# Altium PCB as5600-module.PcbDoc
Units mm, origin at the board's own origin, x right, y up, seen from the top; angles counter-clockwise.
Board outline 42 x 42 mm, 2 copper layers (Top Layer, Bottom Layer), stack 1.581 mm thick; 31 components, 23 nets, 129 pads, 69 vias.
Unrouted connection lines stored in the file: 1.
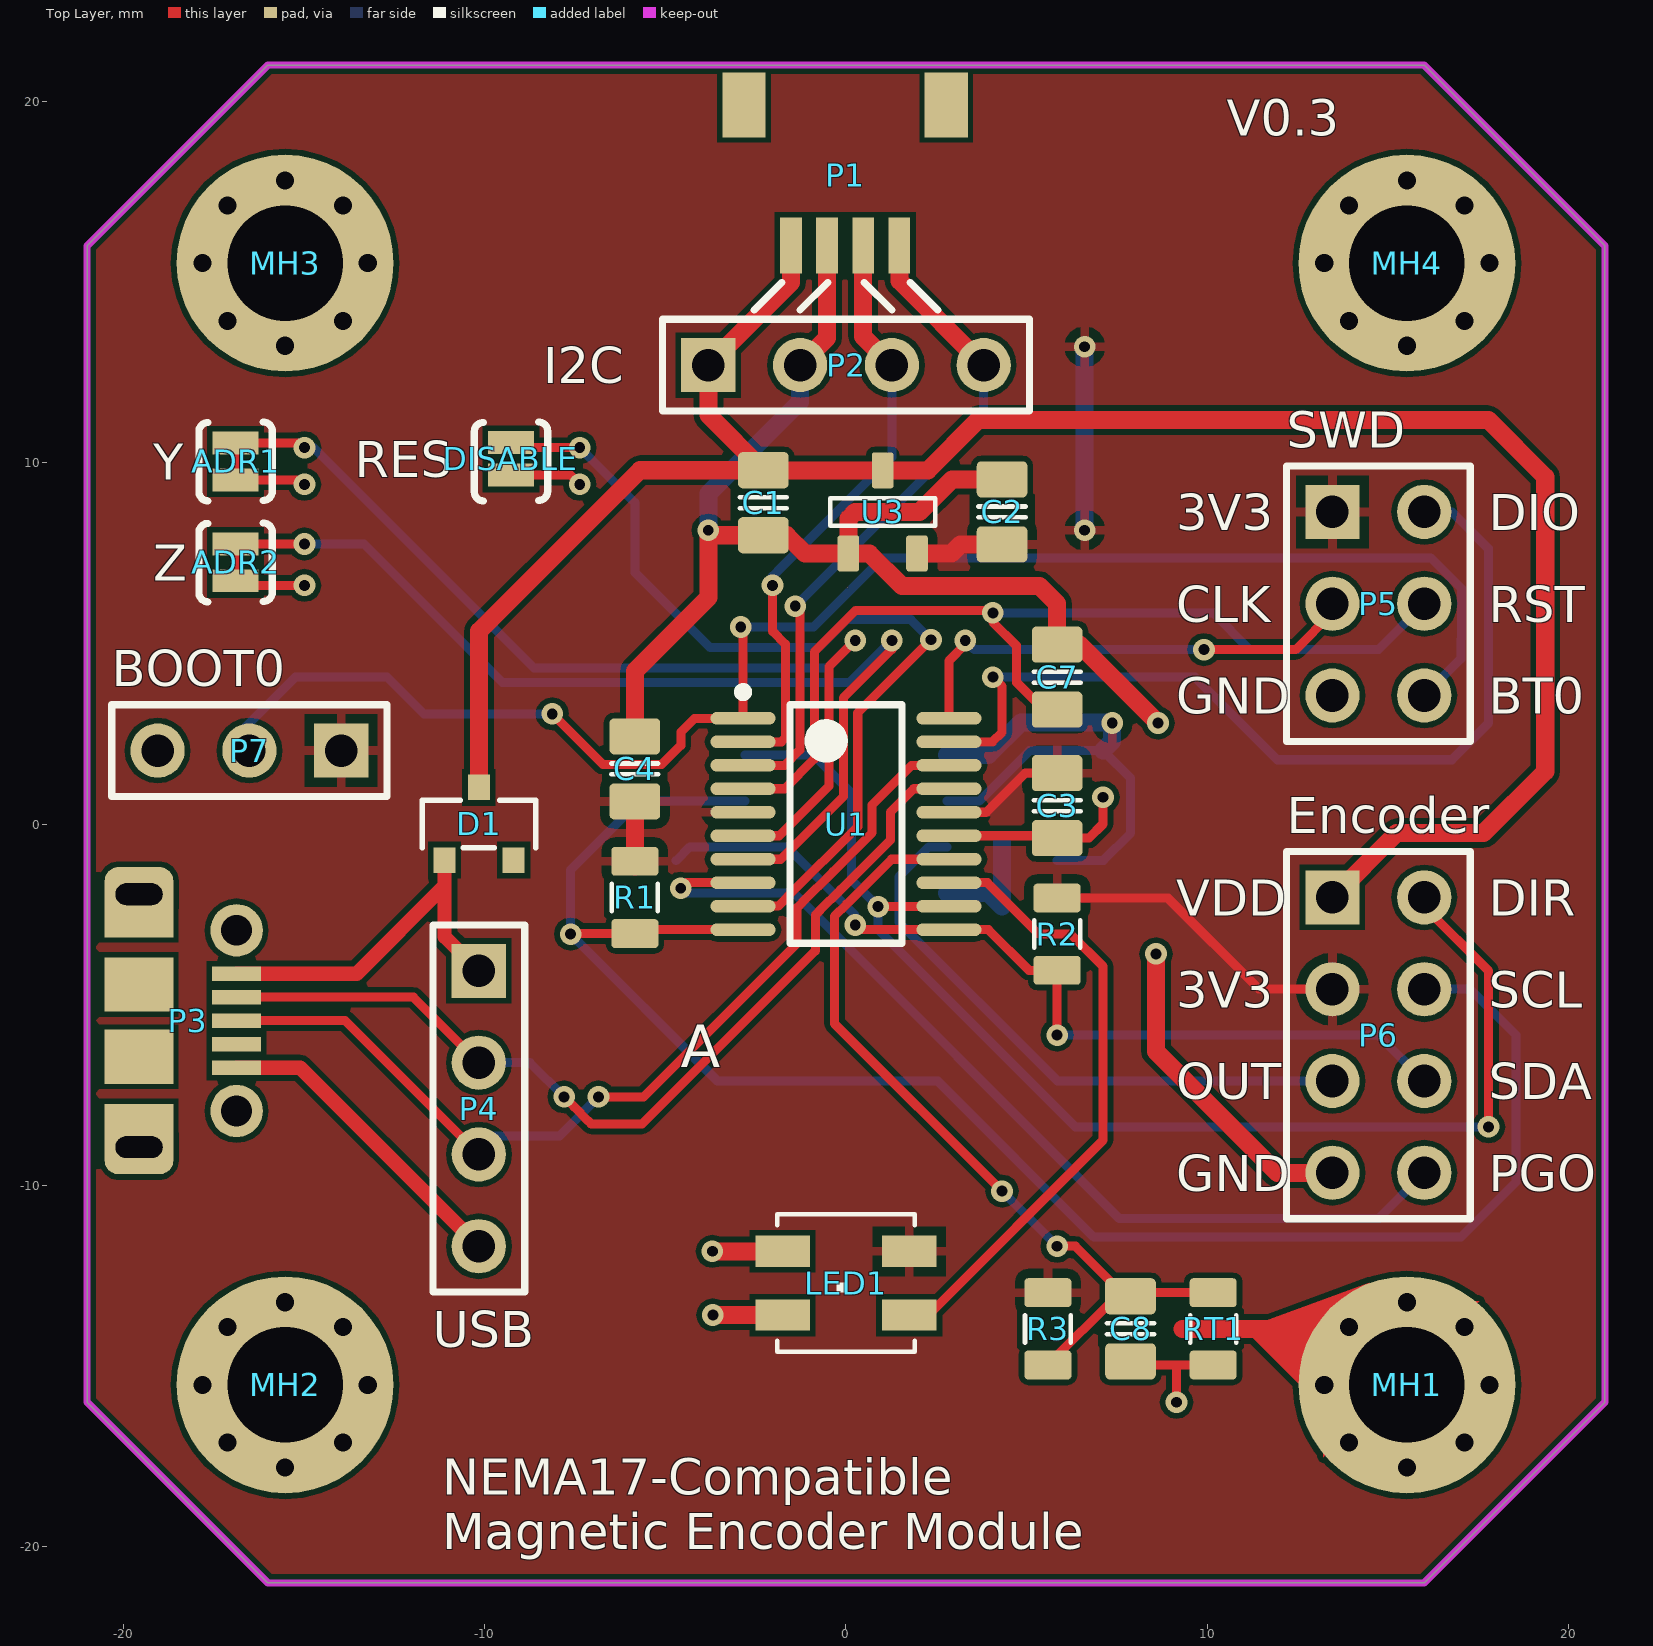
[diagram p0: Top Layer view]
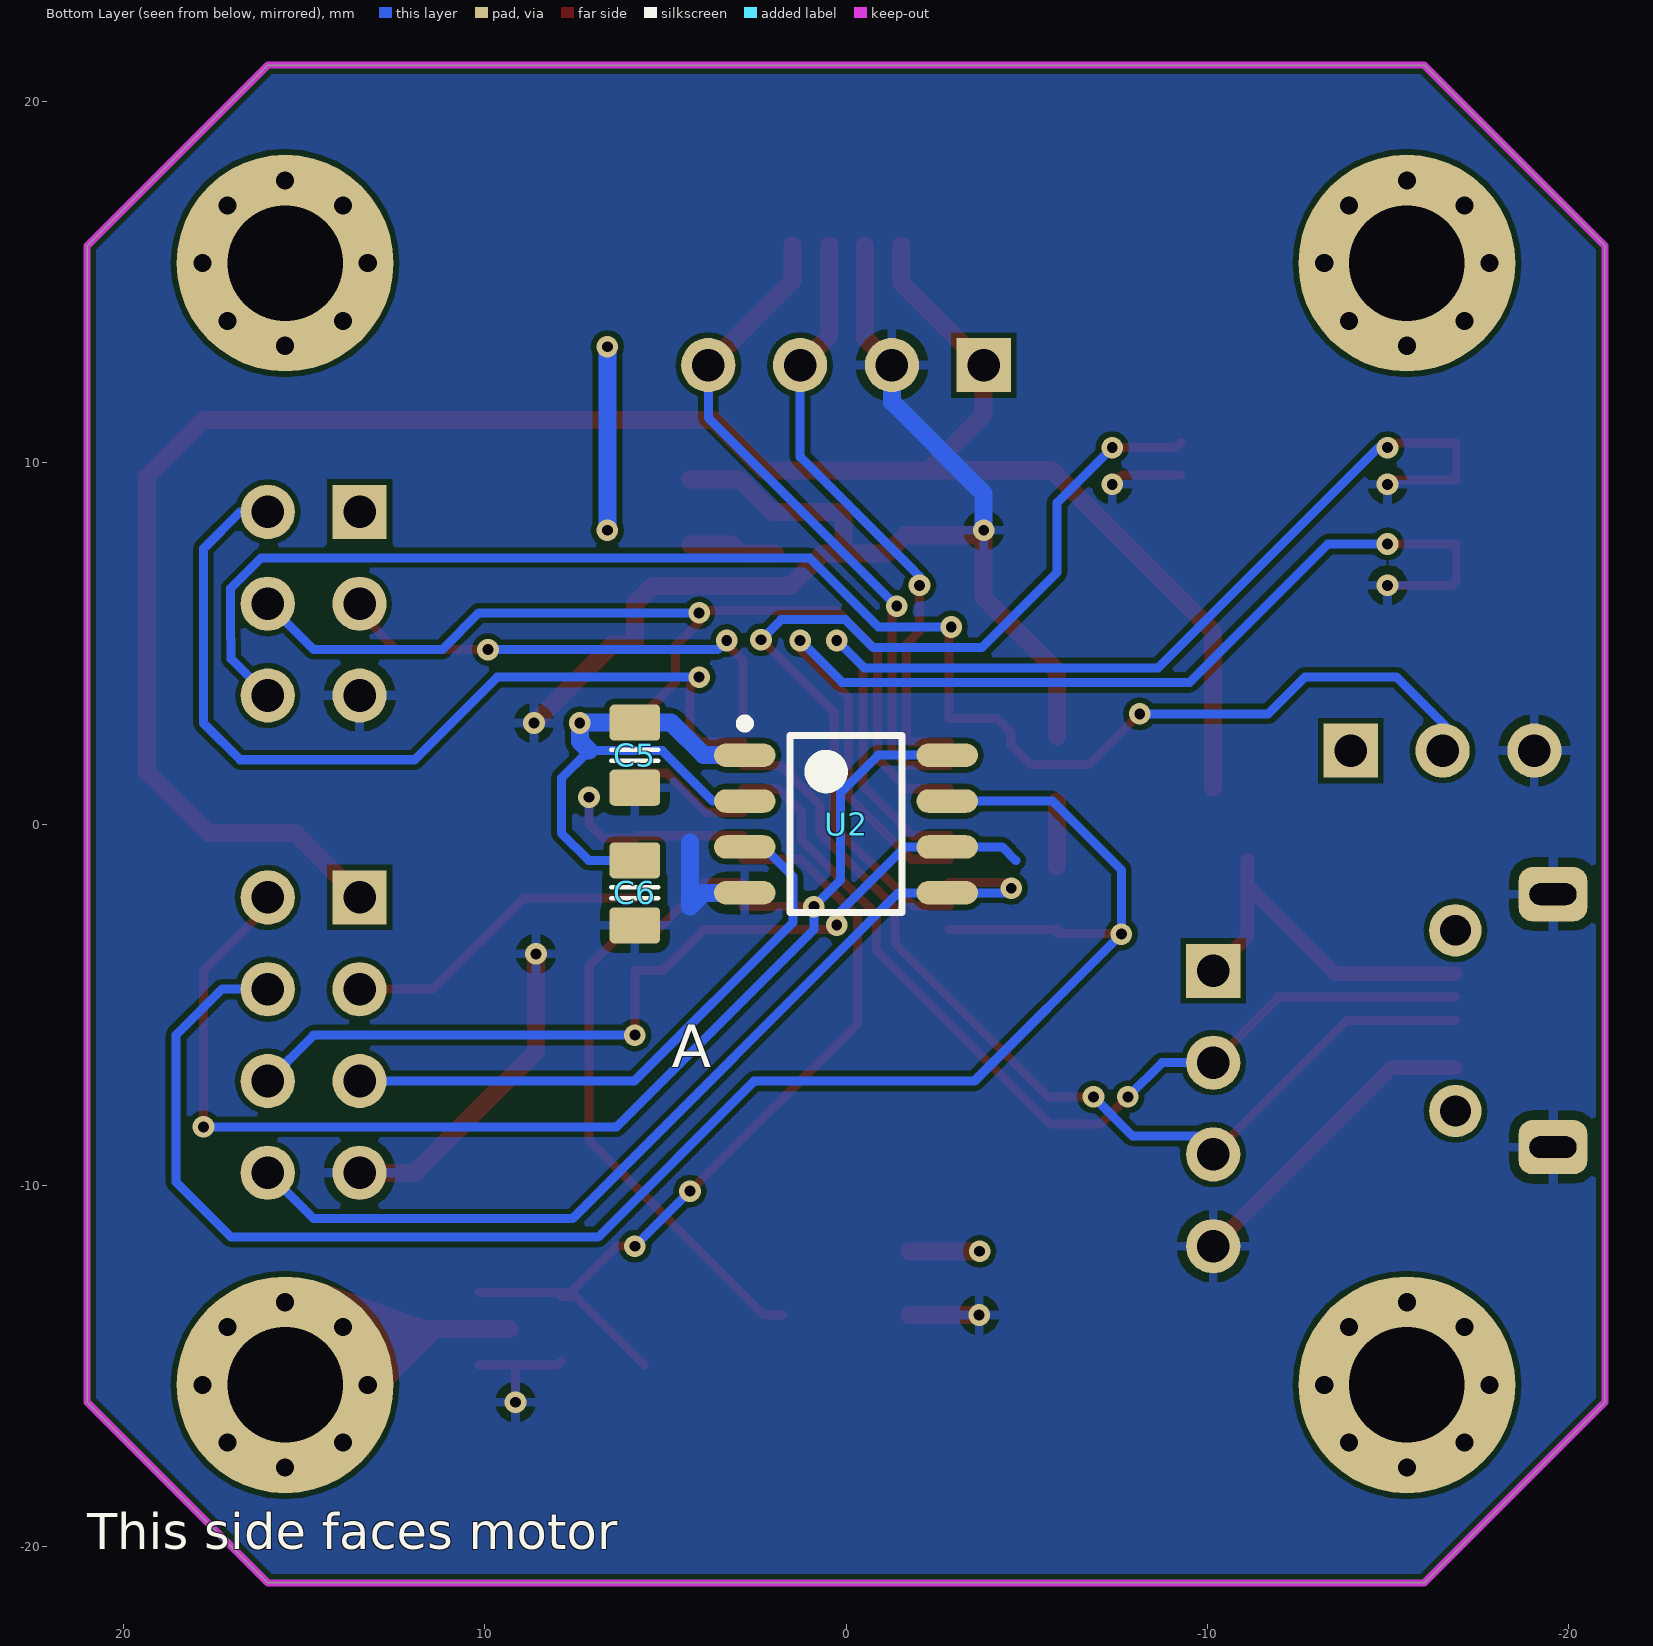
[diagram p1: Bottom Layer view, seen from below]
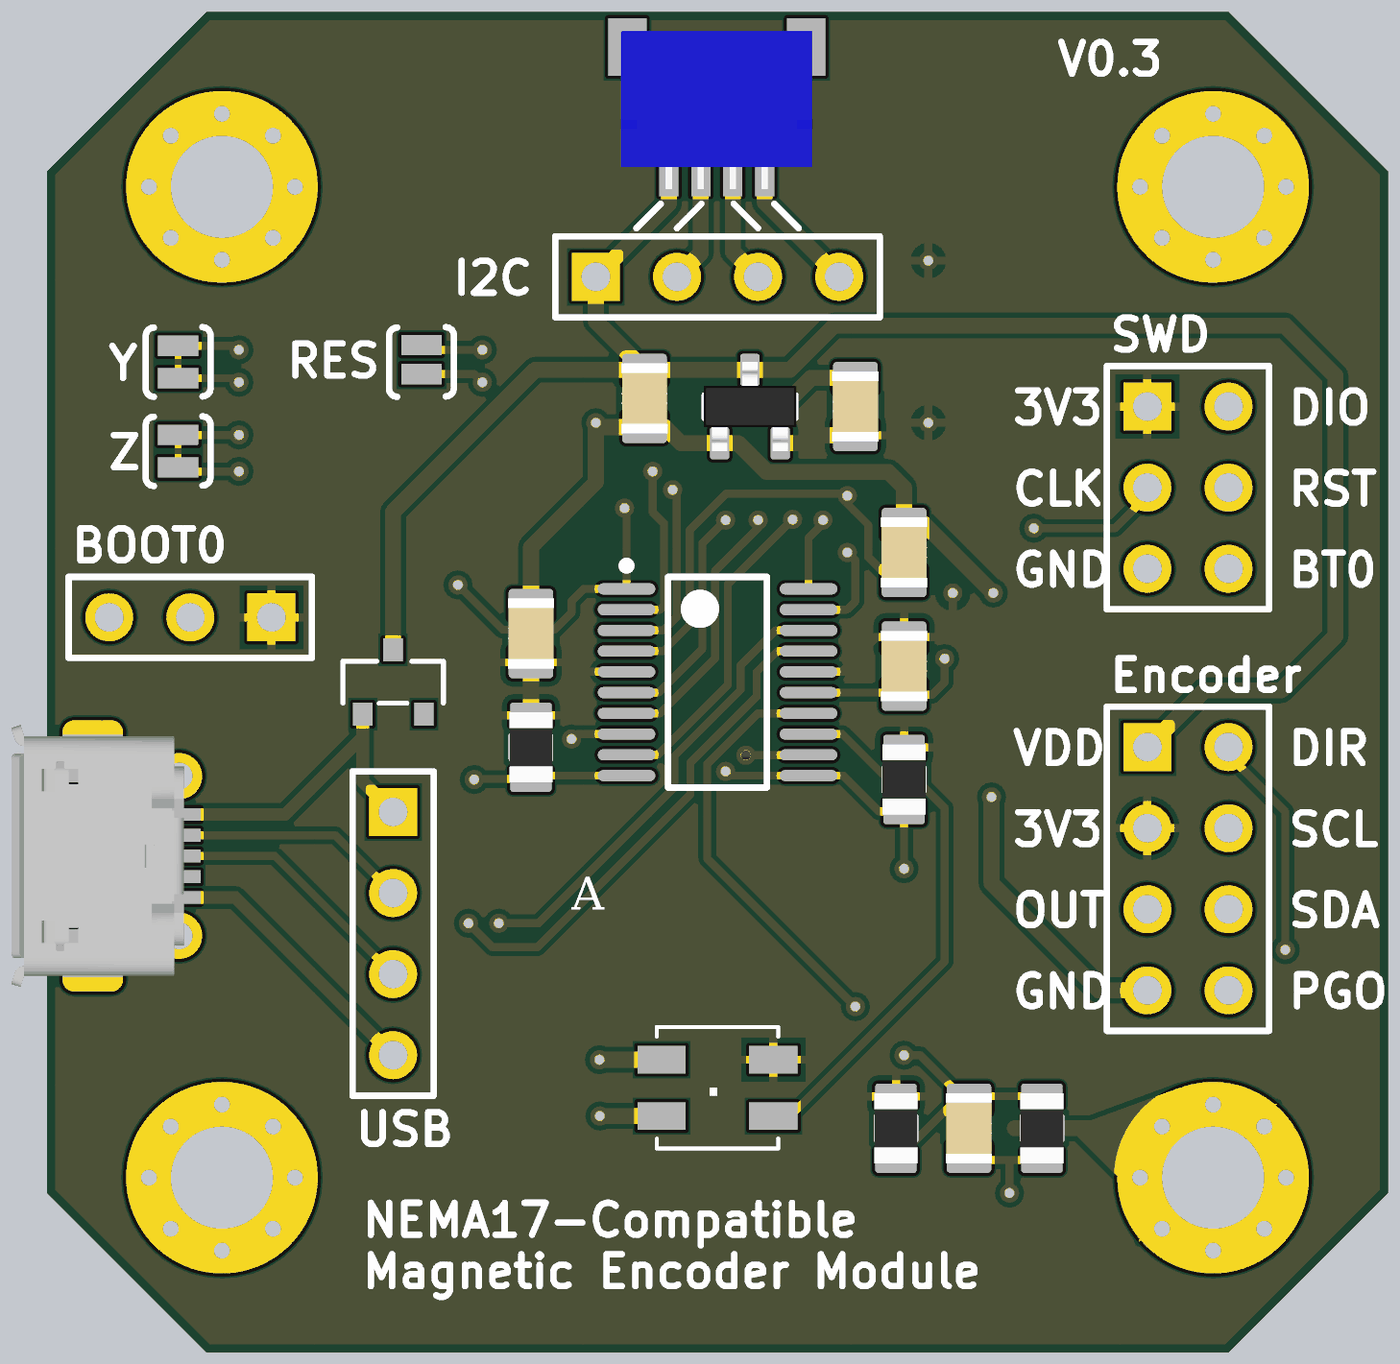
[diagram p2: 3D render of the assembled board from above, using the file's embedded part models]
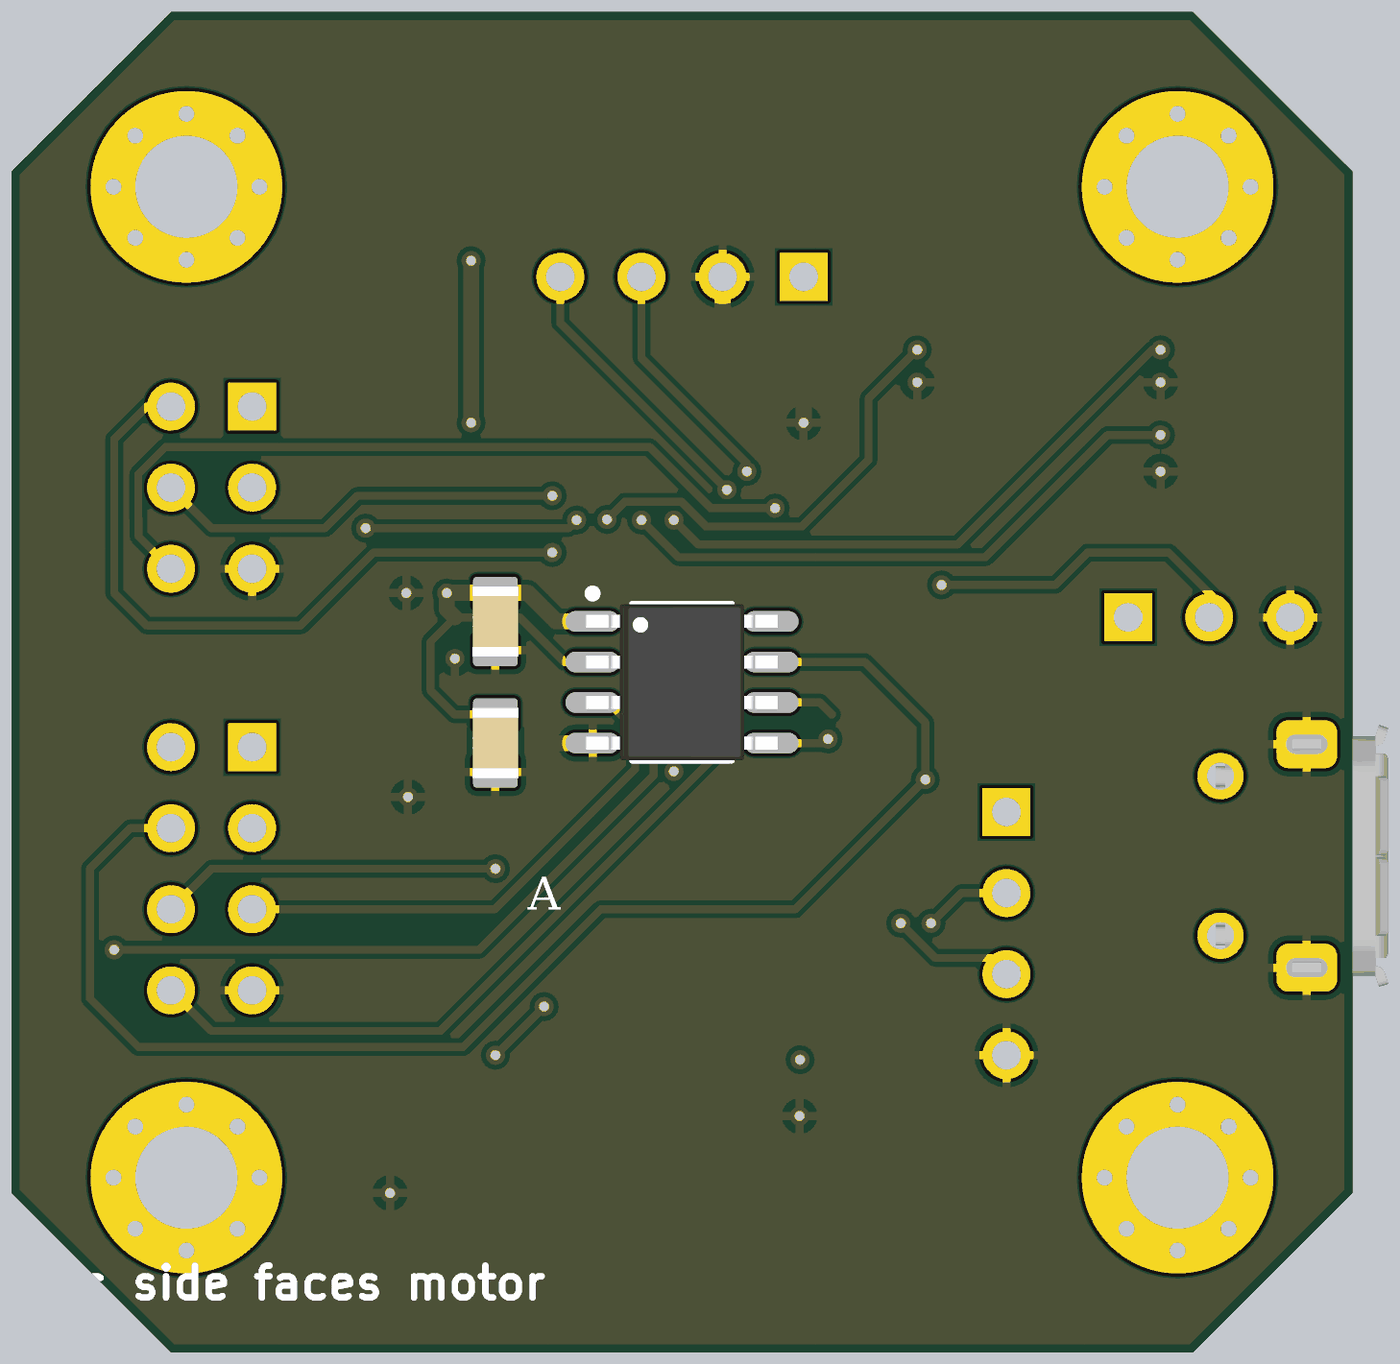
[diagram p3: 3D render of the assembled board from below, using the file's embedded part models]

## Layer stack, top to bottom
Top Solder: solder mask 0.0102, Solder Resist, Dk 3.5
Top Layer: signal copper 0.0356
Dielectric1: dielectric 1.51, FR-4, Dk 4.8
Bottom Layer: signal copper 0.0356
Bottom Solder: solder mask 0.0102, Solder Resist, Dk 3.5

## Board outline
-21,-16 -16,-21 16,-21 21,-16 21,16 16,21 -16,21 -21,16

## Design rules (kind name [scope] priority, off if disabled: settings)
Clearance [All] p1: gap=0.15
DiffPairsRouting [All] p1: maxlimit=0.5 minlimit=0.25 mostfreqgap=0.25 toplayer_minwidth=0.25 toplayer_maxwidth=0.5 toplayer_prefwidth=0.25 bottomlayer_minwidth=0.25 bottomlayer_maxwidth=0.5 bottomlayer_prefwidth=0.25 maxuncoupledlength=12.7
FabricationTestPointUsage TestPointUsage [All] p1: valid=0 allowmultiple=FALSE
FabricationTestpoint Testpoint [All] p1: side=3 testpointundercomponent=TRUE minsize=1.016 maxsize=2.54 preferedsize=1.524 minholesize=0 maxholesize=1.016 preferedholesize=0.813 testpointgrid=0.025 allowsidetop=TRUE allowsidebottom=TRUE usegrid=TRUE gridtolerance=0
HoleSize [All] p1: absolutevalues=TRUE maxlimit=3.5 minlimit=0.025 maxpercent=80.000 minpercent=20.000
PolygonConnect [All] p1: connectstyle=Relief reliefconductorwidth=0.254 reliefentries=4 polygonreliefangle="90 Angle" airgapwidth=0.254
RoutingVias [All] p1: holewidth=0.3 width=0.6 viastyle="Through Hole" minholewidth=0.3 minwidth=0.6 maxholewidth=1 maxwidth=1.4
SilkToSolderMaskClearance SilkscreenOverComponentPads [IsPad] p1: minsilkscreentomaskgap=0.254 clearancetoexposedcopper=TRUE
SolderMaskExpansion [All] p1: expansion=0.102
Width [All] p1: maxlimit=1 minlimit=0.2 preferedwidth=0.25
25 further rules are at their usual default settings.

## Classes and differential pairs
differential pair USB: +USB_P -USB_N

## Components (designator, comment, footprint, x,y, rotation, side; value= is the part's Value field where it differs from the comment)
ADR1 "JUMPER-PAD-2-NC_BY_TRACE" PAD-JUMPER-2-NC_BY_TRACE_YES_SILK -16.891,10.033 r90 top
ADR2 "JUMPER-PAD-2-NC_BY_TRACE" PAD-JUMPER-2-NC_BY_TRACE_YES_SILK -16.891,7.239 r90 top
C1 "approved sub OK" CAPC2012X135N -2.286,8.89 r270 top
C2 "approved sub OK" CAPC2012X135N 4.318,8.636 r90 top
C3 "approved sub OK" CAPC2012X135N 5.842,0.508 r270 top
C4 "approved sub OK" CAPC2012X135N -5.842,1.524 r90 top
C5 "approved sub OK" CAPC2012X135N 5.842,1.905 r270 bottom
C6 "approved sub OK" CAPC2012X135N 5.842,-1.905 r270 bottom
C7 "approved sub OK" CAPC2012X135N 5.842,4.064 r90 top
C8 "approved sub OK" CAPC2012X135N 7.874,-13.97 r270 top
D1 "Diode   SMADIODE - SMA Surface Mount Package  20V 1A Schottky Diode Digikey: 641-1014-6-ND    DO-1N4148 - Through Hole Small Current Diode SOD-123 20V 1 A (.5mV Vf) Schottky Diode - Digikey: MBRX120TPMSCT-ND    SOD-323 10V 570mA (.38mV Vf, 3ns) Schottky Diode - Digikey: ZLLS410CT-ND    SOD-523 30V 30mA Schottky Diode (RB751S-40TE61) - Digikey: RB751S-40TE61CT-ND    SOT23-R/W - SOT23 Package (R = Solder Paste/Reflow Ovens, W = Hand-Soldering)  BAT54Film 40V 300mA - Digikey: 497-7162-1-ND" SOT23-R -10.16,0 r0 top
DISABLE "JUMPER-PAD-2-NO" PAD-JUMPER-2-NO_NO_SILK -9.271,10.109 r270 top
LED1 "WS2812B3535" LED3535 0,-12.7 r180 top
MH1 "M3" M3-Hole-3 15.52,-15.52 r0 top
MH2 "M3" M3-Hole-3 -15.52,-15.52 r0 top
MH3 "M3" M3-Hole-3 -15.52,15.52 r0 top
MH4 "M3" M3-Hole-3 15.52,15.52 r0 top
P1 "I2C_1" SM04B-SRSS-TB -1.524,16.002 r90 top
P2 "I2C_2" HDR1X4 -3.81,12.7 r0 top
P3 "Micro-USB B Socket" "MICRO-USB B MOLEX 105017-0001" -16.864,-5.442 r270 top
P4 "USB_2" HDR1X4 -10.16,-4.064 r270 top
P5 "SWD" HDR2X3 13.462,8.636 r270 top
P6 "Encoder Breakout" HDR2X4 13.462,-2.032 r270 top
P7 "BOOT_SEL" HDR1X3 -13.97,2.032 r180 top
R1 "Thick Film" RESC2012X70N -5.842,-2.032 r270 top
R2 "Thick Film" RESC2012X70N 5.842,-3.048 r270 top
R3 "Thick Film" RESC2012X70N 5.588,-13.97 r270 top
RT1 "RES_EMPTY_0805" RESC2012X70N 10.16,-13.97 r90 top
U1 "STM32F030F4P6" STM-TSSOP20_N 0,0 r0 top
U2 "AS5600" "AS5600 - SOIC127P600X175-8M" 0,0 r180 bottom
U3 "AP7313-33SR" SOT23-3 1.016,8.636 r90 top

## Footprints (in the part's own frame and the unit in brackets; to place one, negate y for a bottom-side part, rotate by r counter-clockwise, add the part's x,y. Pads: shape width x height; smd on the part's side, far side on the other; paste and mask are expansions set on the pad)
"AS5600 - SOIC127P600X175-8M" [mm] "SOIC, 8-Leads, Body 4.90x3.90mm, Pitch 1.27mm, IPC Low Density"
  oval 1.7x0.65 smd: 1(-2.8,1.905) 2(-2.8,0.635) 3(-2.8,-0.635) 4(-2.8,-1.905) 5(2.8,-1.905) 6(2.8,-0.635) 7(2.8,0.635) 8(2.8,1.905)
  silkscreen extent -2.93,-2.45 1.55,2.9, body extent -3,-2.45 3,2.45, height 1.75
CAPC2012X135N [mm] "Chip Capacitor, Body 2.0x1.2mm, EIA 0805, IPC Medium Density"
  round 0.254 on Mech15: 0(0,0)
  rrect25% 1x1.4 smd: 1(-0.9,0) 2(0.9,0)
  Top Layer pour cut-out: -0.675,0.7 -0.475,0.9 0.475,0.9 0.675,0.7 0.675,-0.7 0.475,-0.9 -0.475,-0.9 -0.675,-0.7
  silkscreen extent -0.15,-0.65 0.15,0.65, body extent -1.1,-0.72 1.1,0.73, height 1.34
HDR1X3 [mm] "Connector; Header; 3 Position"
  rect 1.5x1.5 hole 0.9: 1(0,0)
  round 1.5 hole 0.9: 2(2.54,0) 3(5.08,0)
  silkscreen extent -1.27,-1.27 6.35,1.27
HDR1X4 [mm] "Connector; Header; 4 Position"
  rect 1.5x1.5 hole 0.9: 1(0,0)
  round 1.5 hole 0.9: 2(2.54,0) 3(5.08,0) 4(7.62,0)
  silkscreen extent -1.27,-1.27 8.89,1.27
HDR2X3 [mm] "Connector; Header; 3x2 Position"
  rect 1.5x1.5 hole 0.9: 1(0,0)
  round 1.5 hole 0.9: 2(0,2.54) 3(2.54,0) 4(2.54,2.54) 5(5.08,0) 6(5.08,2.54)
  silkscreen extent -1.27,-1.27 6.35,3.81
HDR2X4 [mm] "Connector; Header; 4x2 Position"
  rect 1.5x1.5 hole 0.9: 1(0,0)
  round 1.5 hole 0.9: 2(0,2.54) 3(2.54,0) 4(2.54,2.54) 5(5.08,0) 6(5.08,2.54) 7(7.62,0) 8(7.62,2.54)
  silkscreen extent -1.27,-1.27 8.89,3.81
LED3535 [mil]
  rect 59.69x34 smd: 1(-68.9,35) 2(-68.9,-34.45) 3(69,-34.45) 4(69,35)
  silkscreen extent -75,-75 75,75
M3-Hole-3 [mm]
  round 6 hole 3.2: M3(0,0)
"MICRO-USB B MOLEX 105017-0001" [mm]
  round 1.45 hole 0.85: 4(-2.5,0) 5(2.5,0)
  rect 1.5x1.9 smd: 6(-1,-2.7) 7(1,-2.7) SHIELD(-3.05,-2.7) SHIELD(3.05,-2.7)
  rect 0.4x1.35 smd: D+(0,0) D-(-0.65,0) GND(1.3,0) ID(0.65,0) VBUS(-1.3,0)
  rrect50% 1.5x1.9 hole 0.6 slot 1.3 at 90 deg paste+0: SHIELD(-3.5,-2.7) SHIELD(3.5,-2.7)
  body extent -4.1,-5.25 4.1,0.15, height 2.68
PAD-JUMPER-2-NC_BY_TRACE_YES_SILK [mil]
  rect 25x50 smd: 1(-20,0) 2(20,0)
  Top Layer lines w8: -15,0 15,0
PAD-JUMPER-2-NO_NO_SILK [mil]
  rect 25x50 smd: 1(-17.72,0) 2(18,0)
RESC2012X70N [mm] "Chip Resistor, Body 2.0x1.2mm, EIA 0805, IPC Medium Density"
  round 0.254 on Mech15: 0(0,0)
  rrect25% 0.8x1.3 smd: 1(-1,0) 2(1,0)
  Top Layer pour cut-out: -0.725,0.65 -0.525,0.85 0.525,0.85 0.725,0.65 0.725,-0.65 0.525,-0.85 -0.525,-0.85 -0.725,-0.65
  silkscreen extent -0.38,-0.64 0.38,0.64, body extent -1.1,-0.67 1.1,0.68, height 0.69
SM04B-SRSS-TB [mm]
  rect 1.55x0.6 smd: 0(0,0) 1(0,-1) 2(0,-2) 3(0,-3)
  rect 1.8x1.2 smd: ""(3.9,-4.3) ""(3.9,1.3)
  body extent -0.55,-4.5 4.4,1.5, height 2.96
SOT23-3 [mm] "SOT23, 3 pin"
  round 0.5 on Mech15: 0(0,0)
  rrect25% 1x0.6 smd: 1(-1.15,0.95) 2(-1.15,-0.95) 3(1.15,0)
  silkscreen extent -0.38,-1.45 0.38,1.45, body extent -1.4,-1.45 1.4,1.45, height 1.29
SOT23-R [mil]
  rect 24x28 smd: 1(-37.4,-39.37) 2(38,-39.37) 3(0,40)
  silkscreen extent -62,-26 62,26
STM-TSSOP20_N [mm] "SOP, 20-Leads, Body 6.6x4.5mm, Pitch 0.65mm, IPC Medium Density"
  oval 1.8x0.35 smd: 1(-2.85,2.925) 2(-2.85,2.275) 3(-2.85,1.625) 4(-2.85,0.975) 5(-2.85,0.325) 6(-2.85,-0.325) 7(-2.85,-0.975) 8(-2.85,-1.625) 9(-2.85,-2.275) 10(-2.85,-2.925) 11(2.85,-2.925) 12(2.85,-2.275) 13(2.85,-1.625) 14(2.85,-0.975) 15(2.85,-0.325) 16(2.85,0.325) 17(2.85,0.975) 18(2.85,1.625) 19(2.85,2.275) 20(2.85,2.925)
  silkscreen extent -2.97,-3.3 1.55,3.77, body extent -2.25,-3.3 2.25,3.3, height 1.2

## Part data
C1 C6: library part CAPC_10u_0805_10V, "Capacitor SMD Cer 10uF 10% 10V X5R 0805"
C2: library part CAPC_4u7_0805, "Capacitor SMD Cer 4.7uF 10% 16V X5R 0805"
C3 C4 C5 C7 C8: library part CAPC_100n_0805_X7R_50V_10%, "Capacitor SMD Cer 100nF 10% 50V X7R 0805"
D1: library part DIODESOT23_REFLOW
MH1 MH2 MH3 MH4: library part "Screw Hole"
P1: library part SM04B-SRSS-TB
P2 P4: library part "Header 4", "Header, 4-Pin"
P5: library part "Header 3X2", "Header, 3-Pin, Dual row"
P6: library part "Header 4X2", "Header, 4-Pin, Dual row"
P7: library part "Header 3", "Header, 3-Pin"
R1 R2 R3: library part RES_3K3_0805_1%, "Resistor SMD chip 3.3k Ohm 0.125W 1% 0805"
RT1: "Resistor, 0805 SMD, Empty footprint"
U1: "ARM Cortex-M0 32-bit MCU, 16 KB Flash, 4 KB Internal RAM, 15 I/Os, 20-pin TSSOP, -40 to 85 degC, Tube"
U2: library part "AMS AS5600"
U3: library part VREG_3V3_AP7313-33SR, "Voltage Regulator 3.3V LDO SOT23R-3 SMD"

## Via types
v1: diameter 0.6, hole 0.3, Top Layer to Bottom Layer, tented both sides, 37 vias
v2: diameter 0.6, hole 0.5, Top Layer to Bottom Layer, 32 vias

## Nets (pads, with @x,y where several pads share a name; then routed paths per layer and width w, separated by ;. In a path a pad name is that pad's centre, name@x,y a point inside that pad or via, vN(x,y) a via of type N, cw(c..) or ccw(c..) an arc to the next point about the centre after c; other vN are vias at no path point)
3V3: C2.1 C3.1 C4.1 C5.1 C6.1 LED1.2 P5.1 P6.3 P7.1 R1.1 R2.1 R3.1 U1.5 U1.16 U2.1 U2.2 U3.2 | length 37.1
  Top Layer w0.25: U1.16 3.881,0.325 4.964,1.408 C3.1 ; R2.1 8.906,-2.048 11.43,-4.572 P6.3
  Top Layer w0.5: R1.1@-5.842,-1.182 C4.1 ; U3.2 2.914,7.486 3.164,7.736 C2.1
  Bottom Layer w0.25: U2.2 3.683,0.635 5.08,2.032 7.112,2.032 7.874,1.27 7.874,-0.254 7.123,-1.005 C6.1
  Bottom Layer w0.5: U2.1 3.937,1.905 4.837,2.805 C5.1 7.355,2.805 v1(7.366,2.794) 7.366,2.286 7.112,2.032 ; v1(6.604,8.128) v1(6.604,13.208)
ADR1: ADR1.2 U1.6 | length 27.3
  Top Layer w0.25: ADR1.2 -15.113,10.541 v1(-14.986,10.414) ; U1.6 -1.849,-0.325 -0.475,1.049 -0.475,4.351 v1(0.254,5.08)
  Bottom Layer w0.25: v1(-14.986,10.414) -14.732,10.414 -8.636,4.318 -0.508,4.318 v1(0.254,5.08)
ADR2: ADR2.2 U1.7 | length 28.7
  Top Layer w0.25: ADR2.2 v1(-14.986,7.747) ; U1.7 -1.806,-0.975 -0.075,0.756 -0.075,3.488 1.27,4.833 v1(1.27,5.08)
  Bottom Layer w0.25: v1(-14.986,7.747) -13.335,7.747 -9.506,3.918 0.108,3.918 v1(1.27,5.08) v1@1.27,5.131
BOOT0: P5.6 P7.2 U1.1 | length 43.1
  Top Layer w0.25: v1(-8.128,3.048) -6.729,1.649 -5.101,1.649 -4.572,2.178 -4.572,2.54 -4.187,2.925 U1.1 -2.85,5.39 v1(-2.914,5.454)
  Bottom Layer w0.25: P7.2@-16.637,2.667 -15.24,4.064 -12.7,4.064 -11.684,3.048 v1(-8.128,3.048) ; v1(-2.914,5.454) -0.896,5.454 1.016,7.366 16.182,7.366 17.027,6.521 17.027,5.117 17.018,5.108 17.018,4.572 P5.6
DISABLE: DISABLE.1 U1.9 | length 25.8
  Top Layer w0.25: DISABLE.1 -9.126,10.414 v1(-7.366,10.414) ; U1.9 -1.875,-2.275 -1.621,-2.021 -1.621,-2.017 0.325,-0.071 0.325,3.075 v1(2.35,5.1)
  Bottom Layer w0.25: v1(-7.366,10.414) -5.842,8.89 -5.842,6.964 -3.757,4.879 -0.76,4.879 0.016,5.655 1.795,5.655 v1(2.35,5.1)
EN_DIR: P6.2 U1.12 U2.8 | length 35.7
  Top Layer w0.25: v1(0.889,-2.286) 2.839,-2.286 U1.12 ; P6.2 16.002,-2.286 17.78,-4.064 v1(17.78,-8.382)
  Bottom Layer w0.25: U2.8 -0.889,1.905 0.146,0.87 0.146,-1.543 v1(0.889,-2.286) 0.889,-2.921 6.35,-8.382 v1(17.78,-8.382)
EN_OUT: P6.5 U2.3 | length 16.8
  Bottom Layer w0.25: U2.3 2.293,-0.635 1.464,-1.464 1.464,-2.718 5.858,-7.112 P6.5
EN_PGO: P6.8 U1.8 U2.5 | length 26.6
  Top Layer w0.25: v1(-4.572,-1.778) -4.419,-1.625 U1.8
  Bottom Layer w0.25: v1@-4.572,-1.905 U2.5 -1.448,-1.905 7.569,-10.922 14.732,-10.922 P6.8
EN_SCL: P6.4 R1.2 U1.10 U2.7 | length 49.6
  Top Layer w0.25: v1(-7.62,-3.048) -7.604,-3.032 R1.2 ; R1.2@-5.842,-2.882 -5.799,-2.925 U1.10
  Bottom Layer w0.25: U2.7 -5.715,0.635 -7.62,-1.27 v1(-7.62,-3.048) -3.556,-7.112 2.54,-7.112 6.858,-11.43 17.018,-11.43 18.542,-9.906 18.542,-5.842 17.272,-4.572 P6.4
EN_SDA: P6.6 R2.2 U1.11 U2.6 | length 24.7
  Top Layer w0.25: v1(0.254,-2.794) 0.385,-2.925 U1.11 3.941,-2.925 5.064,-4.048 R2.2 v1(5.842,-5.842)
  Bottom Layer w0.25: -4.699,-1.016 -4.318,-0.635 U2.6 -1.639,-0.635 0.254,-2.528 v1(0.254,-2.794) ; v1(5.842,-5.842) 14.732,-5.842 P6.6
GND: ADR1.1 ADR2.1 C1.2 C2.2 C3.2 C4.2 C5.2 C6.2 C7.2 C8.2 DISABLE.2 LED1.4 P1.1 P2.2 P3.GND P3.SHIELD P4.4 P5.5 P6.7 P7.3 RT1.1 U1.15 U2.4 U3.1 | length 74.3
  Top Layer w0.25: ADR2.1 -16.764,6.604 v1(-14.986,6.604) ; ADR1.1 -15.113,9.525 v1(-14.986,9.398) ; DISABLE.2 -7.62,9.652 v1(-7.366,9.398) ; U1.15 5.775,-0.325 C3.2 6.72,-0.392 7.112,0 v1(7.112,0.74) ; C8.2 7.974,-14.97 9.144,-14.97 ; v1(9.144,-16.002) 9.144,-14.97 ; RT1.1 9.144,-14.97
  Top Layer w0.4: P3.GND -15.102,-6.742 P4.4
  Top Layer w0.5: C4.2 -5.842,4.23 -3.81,6.262 v1(-3.81,8.128) -3.672,7.99 C1.2 -1.64,7.99 -1.136,7.486 U3.1 ; v1(-3.683,-13.589) LED1.4 ; P2.2 -0.524,13.446 P1.1 ; C2.2 2.932,9.536 2.032,8.636 0.254,8.636 0.066,8.448 U3.1 ; v1(8.579,-3.594) 8.579,-6.293 11.938,-9.652 P6.7 ; v1(8.636,2.794) 6.466,4.964 C7.2 5.842,6.096 5.352,6.586 1.544,6.586 0.644,7.486 U3.1
  Bottom Layer w0.5: v1(-3.81,8.128) -3.81,9.144 -1.27,11.684 P2.2 ; U2.4 3.937,-1.905 4.318,-2.286 4.318,-0.519
HOST_SCL: P1.3 P2.4 U1.3 | length 18.9
  Top Layer w0.25: U1.3 -1.701,1.625 -1.275,2.051 -1.275,5.847 v1@-1.431,6.003 ; v1@-1.457,6.029 v1(-1.406,6.029)
  Top Layer w0.5: P1.3 1.476,15.034 P2.4
  Bottom Layer w0.25: v1(-1.406,6.029) 3.81,11.245 P2.4
HOST_SDA: P1.2 P2.3 U1.2 | length 16.7
  Top Layer w0.25: U1.2 -1.789,2.275 -1.675,2.389 -1.675,4.977 -2.032,5.334 v1(-2.032,6.604)
  Top Layer w0.5: P1.2 0.476,13.494 P2.3
  Bottom Layer w0.25: v1(-2.032,6.604) -2.032,6.858 -1.778,7.112 1.27,10.16 P2.3
NRST: C7.1 P5.4 U1.4 | length 27.2
  Top Layer w0.25: U1.4 -1.701,0.975 -0.875,1.801 -0.875,4.764 0.27,5.909 3.997,5.909 v1(4.064,5.842) 4.064,5.588 4.718,4.934 4.718,3.918 5.472,3.164 C7.1
  Bottom Layer w0.25: v1(4.064,5.842) 10.16,5.842 11.176,4.826 14.732,4.826 P5.4
SWCLK: P5.3 U1.20 | length 13.3
  Top Layer w0.25: U1.20 2.85,4.516 3.302,4.968 v1(3.302,5.08) ; v1(9.906,4.826) 12.446,4.826 13.462,5.842 P5.3
  Bottom Layer w0.25: v1(3.302,5.08) 3.556,4.826 v1(9.906,4.826)
SWDIO: P5.2 U1.19 | length 25.3
  Top Layer w0.25: U1.19 4.053,2.275 4.318,2.54 4.318,3.81 v1(4.064,4.064)
  Bottom Layer w0.25: v1(4.064,4.064) 9.652,4.064 11.938,1.778 16.764,1.778 17.78,2.794 17.78,7.62 16.764,8.636 P5.2
THERM: C8.1 R3.2 RT1.2 U1.14 | length 23.4
  Top Layer w0.25: U1.14 1.263,-0.975 0.019,-2.219 0.016,-2.219 -0.321,-2.556 -0.321,-5.521 v1(4.318,-10.16) ; R3.2 7.488,-13.07 C8.1 ; v1(5.842,-11.684) 6.35,-11.684 7.636,-12.97 RT1.2
  Bottom Layer w0.25: v1(4.318,-10.16) v1(5.842,-11.684)
USB_N: P3.D- P4.2 U1.17 | length 26
  Top Layer w0.25: P3.D- -11.972,-4.792 P4.2 ; v1@-7.75,-7.6 -7.525,-7.825 -7.525,-7.83 -7.13,-8.225 -7.125,-8.225 -7.05,-8.3 -5.643,-8.3 -0.85,-3.507 -0.85,-2.523 -0.721,-2.394 -0.721,-2.39 -0.15,-1.819 -0.146,-1.819 1.225,-0.448 1.225,0.325 1.875,0.975 U1.17
  Bottom Layer w0.25: P4.2 -8.746,-6.604 v1(-7.8,-7.55)
USB_P: P3.D+ P4.3 U1.18 | length 27.4
  Top Layer w0.25: P3.D+ -13.862,-5.442 P4.3 P4.3@-9.906,-8.89 ; v1(-6.85,-7.55) -5.6,-7.55 -1.35,-3.3 -1.35,-2.316 -1.221,-2.187 -1.221,-2.183 -0.357,-1.319 -0.353,-1.319 0.725,-0.241 0.725,0.532 1.818,1.625 U1.18
  Bottom Layer w0.25: P4.3 -10.16,-8.636 -7.931,-8.636 -6.85,-7.555 v1(-6.85,-7.55)
USB_VDD: D1.1 P3.VBUS P4.1 | length 10.2
  Top Layer w0.4: P3.VBUS -13.54,-4.142 -11.11,-1.712 ; D1.1 -11.11,-1.712 ; P4.1 -11.11,-3.114 -11.11,-1.712
VDD: C1.1 D1.3 P1.0 P2.1 P6.1 U3.3 | length 60.2
  Top Layer w0.5: D1.3 -10.16,5.334 -5.704,9.79 C1.1 ; P1.0 -1.524,14.986 P2.1 -3.81,11.314 C1.1 ; P6.1 15.24,-0.254 17.646,-0.254 19.35,1.45 19.35,9.6 17.774,11.176 3.653,11.176 2.263,9.786 U3.3 -2.282,9.786 C1.1
WS2812B: LED1.1 U1.13 | length 17.4
  Top Layer w0.25: LED1.1 2.27,-13.589 7.112,-8.747 7.112,-3.938 6.222,-3.048 5.334,-3.048 3.911,-1.625 U1.13
WS2812B_OUT: LED1.3 | length 1.9
  Top Layer w0.5: v1(-3.697,-11.825) LED1.3
pads on no net: C1.0 C2.0 C3.0 C4.0 C5.0 C6.0 C7.0 C8.0 D1.2 MH1.M3 MH2.M3 MH3.M3 MH4.M3 P1. P3.4 P3.5 P3.6 P3.7 P3.ID R1.0 R2.0 R3.0 RT1.0 U3.0
copper on no net: | length 7.4
  Top Layer w0.5: 9.31,-13.97 11.938,-13.97 13.488,-15.52 15.52,-15.52 15.52,-15.012
  other v2: -15.52,-17.806 15.52,-17.806 -17.12,-17.12 -13.92,-17.12 13.92,-17.12 17.12,-17.12 -17.806,-15.52 -13.234,-15.52 13.234,-15.52 17.806,-15.52 -17.12,-13.92 -13.92,-13.92 13.92,-13.92 17.12,-13.92 -15.52,-13.234 15.52,-13.234 -15.52,13.234 15.52,13.234 -17.12,13.92 -13.92,13.92 13.92,13.92 17.12,13.92 -17.806,15.52 -13.234,15.52 13.234,15.52 17.806,15.52 -17.12,17.12 -13.92,17.12 13.92,17.12 17.12,17.12 -15.52,17.806 15.52,17.806

## Polygon pours and split planes (outlines as drawn)
GND on Bottom Layer "Bottom Layer-GND" (solid, remove dead copper, pour order 4): 21,-16 16,-21 -16,-21 -21,-16 -21,16 -16,21 16,21 20.955,16.045
3V3 on Top Layer "Top Layer-GND" (solid, remove dead copper, pour order 6): 21,-16 16,-21 -16,-21 -21,-16 -21,16 -16,21 16,21 20.955,16.045

## Keep-outs
Keep-Out Layer:
  the board outline again, w0.2

## Other copper
Top Layer:
  region: 11.01,-13.97 13.208,-16.168 13.208,-17.526 17.526,-13.208 14.986,-13.208 14.478,-12.7

## Silkscreen, mask and mechanical layers (free items; w line width, h text height)
Top Overlay:
  lines w0.2: -17.653,6.147 cw(c-17.653,6.401) -17.907,6.401 -17.907,8.064 cw(c-17.653,8.064) -17.653,8.318 ; -17.653,8.941 cw(c-17.653,9.195) -17.907,9.195 -17.907,10.858 cw(c-17.653,10.858) -17.653,11.112 ; -16.129,6.159 ccw(c-16.129,6.414) -15.875,6.414 -15.875,8.077 ccw(c-16.129,8.077) -16.129,8.331 ; -16.129,8.954 ccw(c-16.129,9.208) -15.875,9.208 -15.875,10.871 ccw(c-16.129,10.871) -16.129,11.125 ; -10.033,8.941 cw(c-10.033,9.195) -10.287,9.195 -10.287,10.858 cw(c-10.033,10.858) -10.033,11.112 ; -8.509,8.954 ccw(c-8.509,9.208) -8.255,9.208 -8.255,10.871 ccw(c-8.509,10.871) -8.509,11.125 ; -2.54,14.224 -1.778,14.986 ; -1.27,14.224 -0.508,14.986 ; 0.508,14.986 1.27,14.224 ; 1.778,14.986 2.54,14.224
  text "V0.3" at 10.541,19.05 h1
  text "I2C" at -8.382,12.192 h1
  text "SWD" at 12.192,10.414 h1
  text "RES" at -13.589,9.601 h1
  text "Y" at -19.177,9.525 h1
  text "3V3" at 9.144,8.128 h1
  text "DIO" at 17.78,8.128 h1
  text "Z" at -19.177,6.731 h1
  text "CLK" at 9.144,5.588 h1
  text "RST" at 17.78,5.588 h1
  text "BOOT0" at -20.32,3.81 h1
  text "GND" at 9.144,3.048 h1
  text "BT0" at 17.78,3.048 h1
  text "Encoder" at 12.192,-0.254 h1
  text "VDD" at 9.144,-2.54 h1
  text "DIR" at 17.78,-2.54 h1
  text "3V3" at 9.144,-5.08 h1
  text "SCL" at 17.78,-5.08 h1
  text "A" at -4.572,-7.112 h2
  text "OUT" at 9.144,-7.62 h1
  text "SDA" at 17.78,-7.62 h1
  text "GND" at 9.144,-10.16 h1
  text "PGO" at 17.78,-10.16 h1
  text "USB" at -11.43,-14.478 h1
  text "NEMA17-Compatible  / Magnetic Encoder Module" at -11.176,-20.066 h1
Bottom Overlay:
  text "A" at 4.826,-7.112 h2
  text "This side faces motor" at 21,-20.066 h1
Mechanical 16:
  drawing of 1874 lines, arcs and shapes, not listed
  text "1" at -105.785,73.869 h1.78
  text "2" at -33.141,73.869 h1.78
  text "3" at 40.011,73.869 h1.78
  text "4" at 112.909,73.869 h1.78
  text "A" at -140.126,50.857 h1.78
  text "A" at 146.894,50.857 h1.78
  text "B" at -140.126,2.8 h1.78
  text "B" at 146.894,2.8 h1.78
  text "C" at -140.126,-45.714 h1.78
  text "C" at 146.894,-45.714 h1.78
  text "ENGINEER:" at 31.959,-82.722 h1.14
  text "TITLE:" at 70.059,-82.722 h1.14
  text "PCB DESIGNER:" at 31.959,-90.215 h1.14
  text "D" at -140.126,-93.72 h1.78
  text "D" at 146.894,-93.72 h1.78
  text "DATE:" at 31.959,-97.962 h1.14
  text "PART NO.:" at 70.059,-97.962 h1.14
  text "REV:" at 123.399,-97.962 h1.14
  text "Altium Limited" at -1.061,-100.502 h1.78
  text ".PRINT_DATE" at 33.229,-101.01 h1.78
  text "12a Rodborough Rd" at -1.061,-103.042 h1.78
  text "Frenchs Forest" at -1.061,-105.582 h1.78
  text "FILE NAME:" at 31.959,-105.582 h1.14
  text "DWG NO:" at 70.059,-105.582 h1.14
  text "SCALE:" at 123.399,-105.582 h1.14
  text "NSW 2086" at -1.061,-108.122 h1.78
  text ".PCB_FILE_NAME_NO_PATH" at 33.229,-108.63 h1.78
  text "1" at -105.785,-114.091 h1.78
  text "2" at -33.141,-114.091 h1.78
  text "3" at 40.011,-114.091 h1.78
  text "4" at 112.909,-114.091 h1.78

## Dimensions
-15.52,-15.52 to -15.52,15.52 on Mechanical 16
-16,21 to -16,-21 on Mechanical 16
-21,16 to 21,16 on Mechanical 16
-15.52,15.52 to 15.52,15.52 on Mechanical 16